# Altium PCB M9A_12_3190102060_A.PcbDoc
Units mil, origin at the board's own origin, x right, y up, seen from the top; angles counter-clockwise.
Board outline 4000 x 3760 mil, 2 copper layers (Top Layer, Bottom Layer); 14 components, 19 nets, 84 pads, 21 vias.
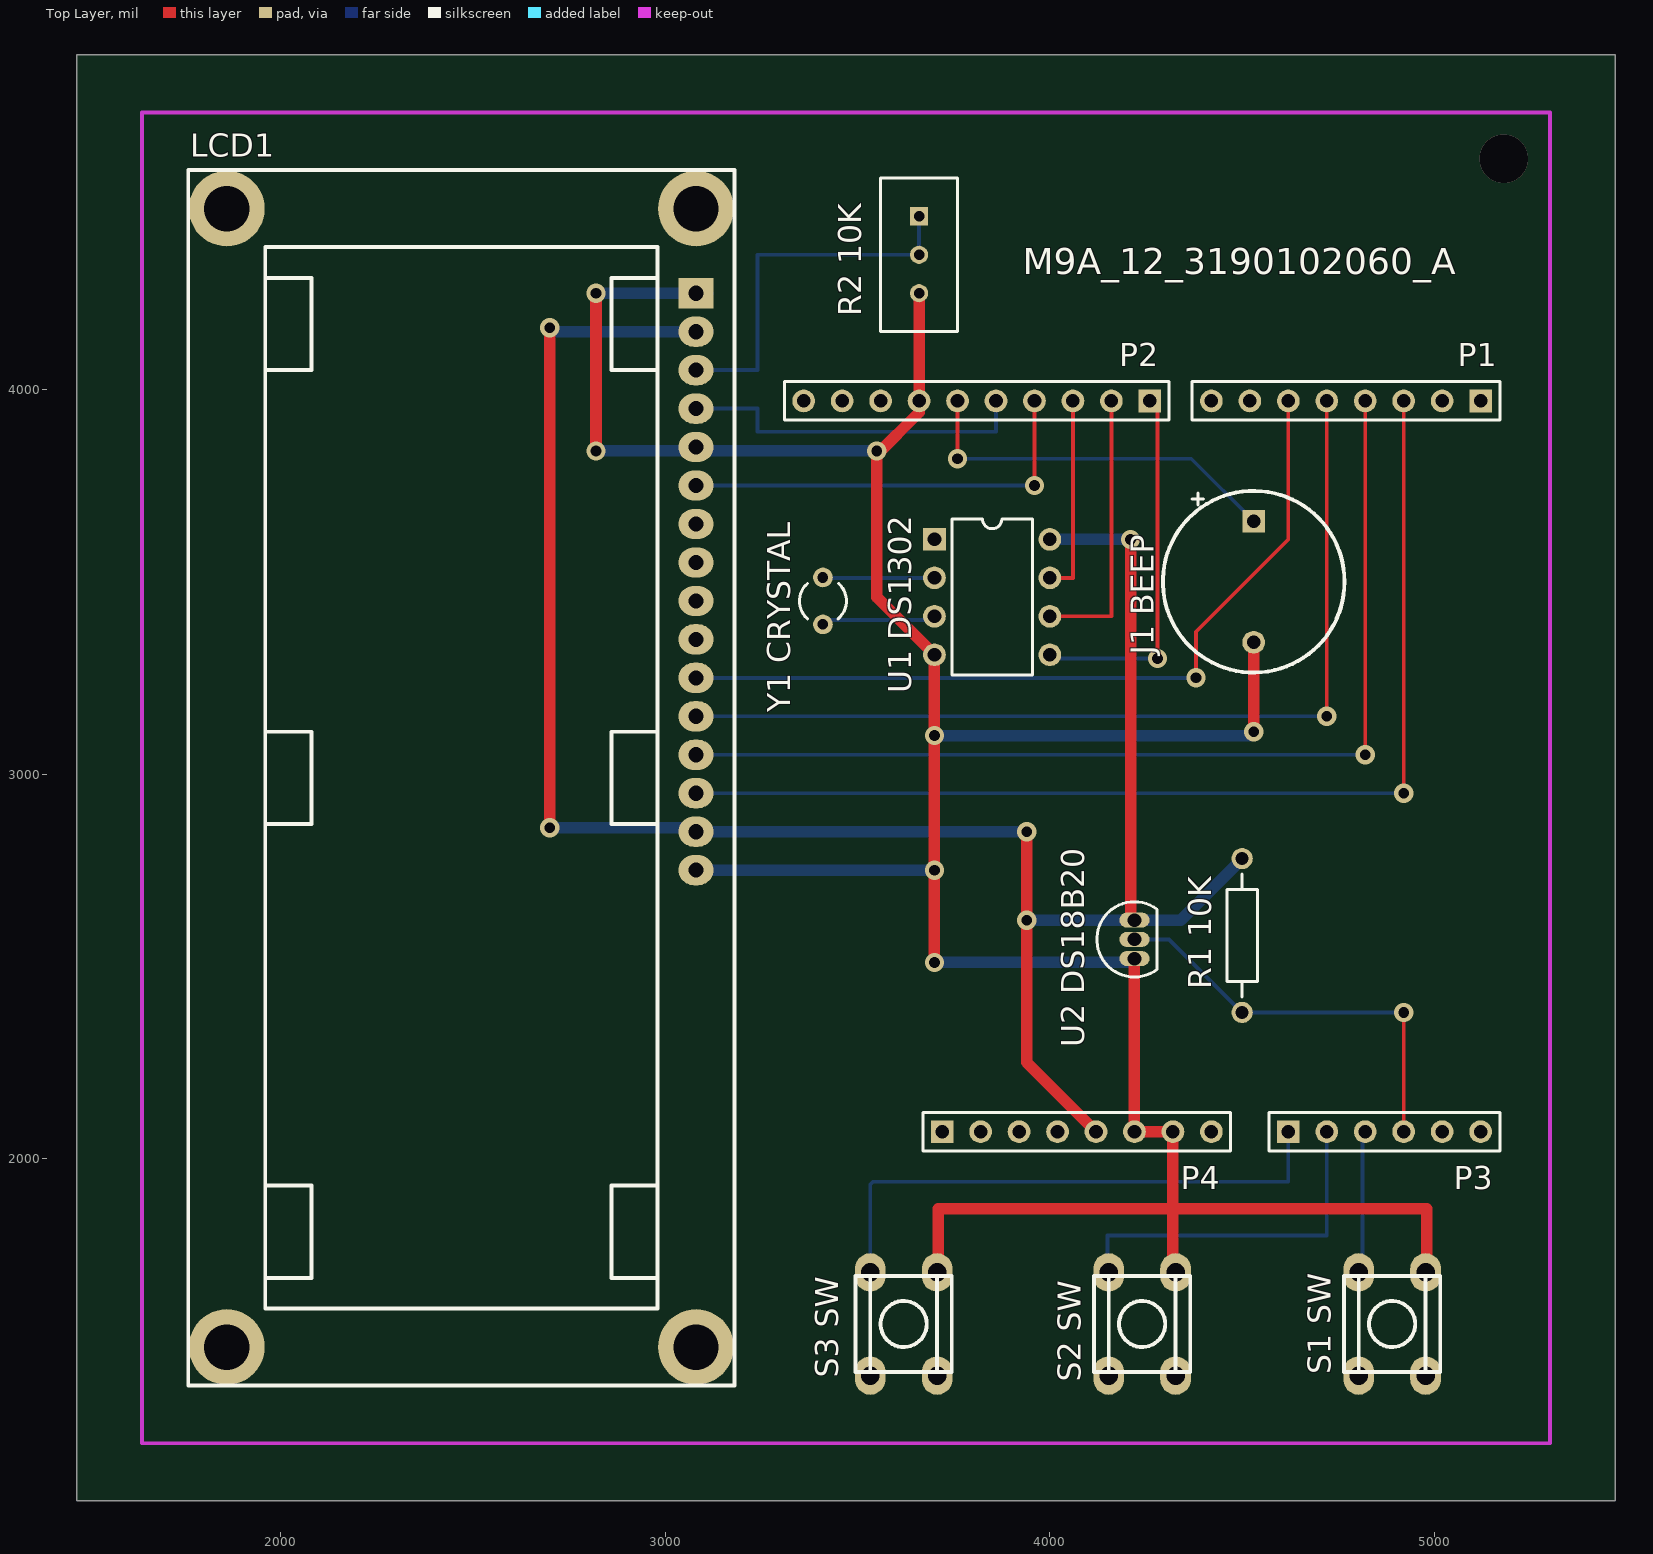
[diagram p0: Top Layer view]
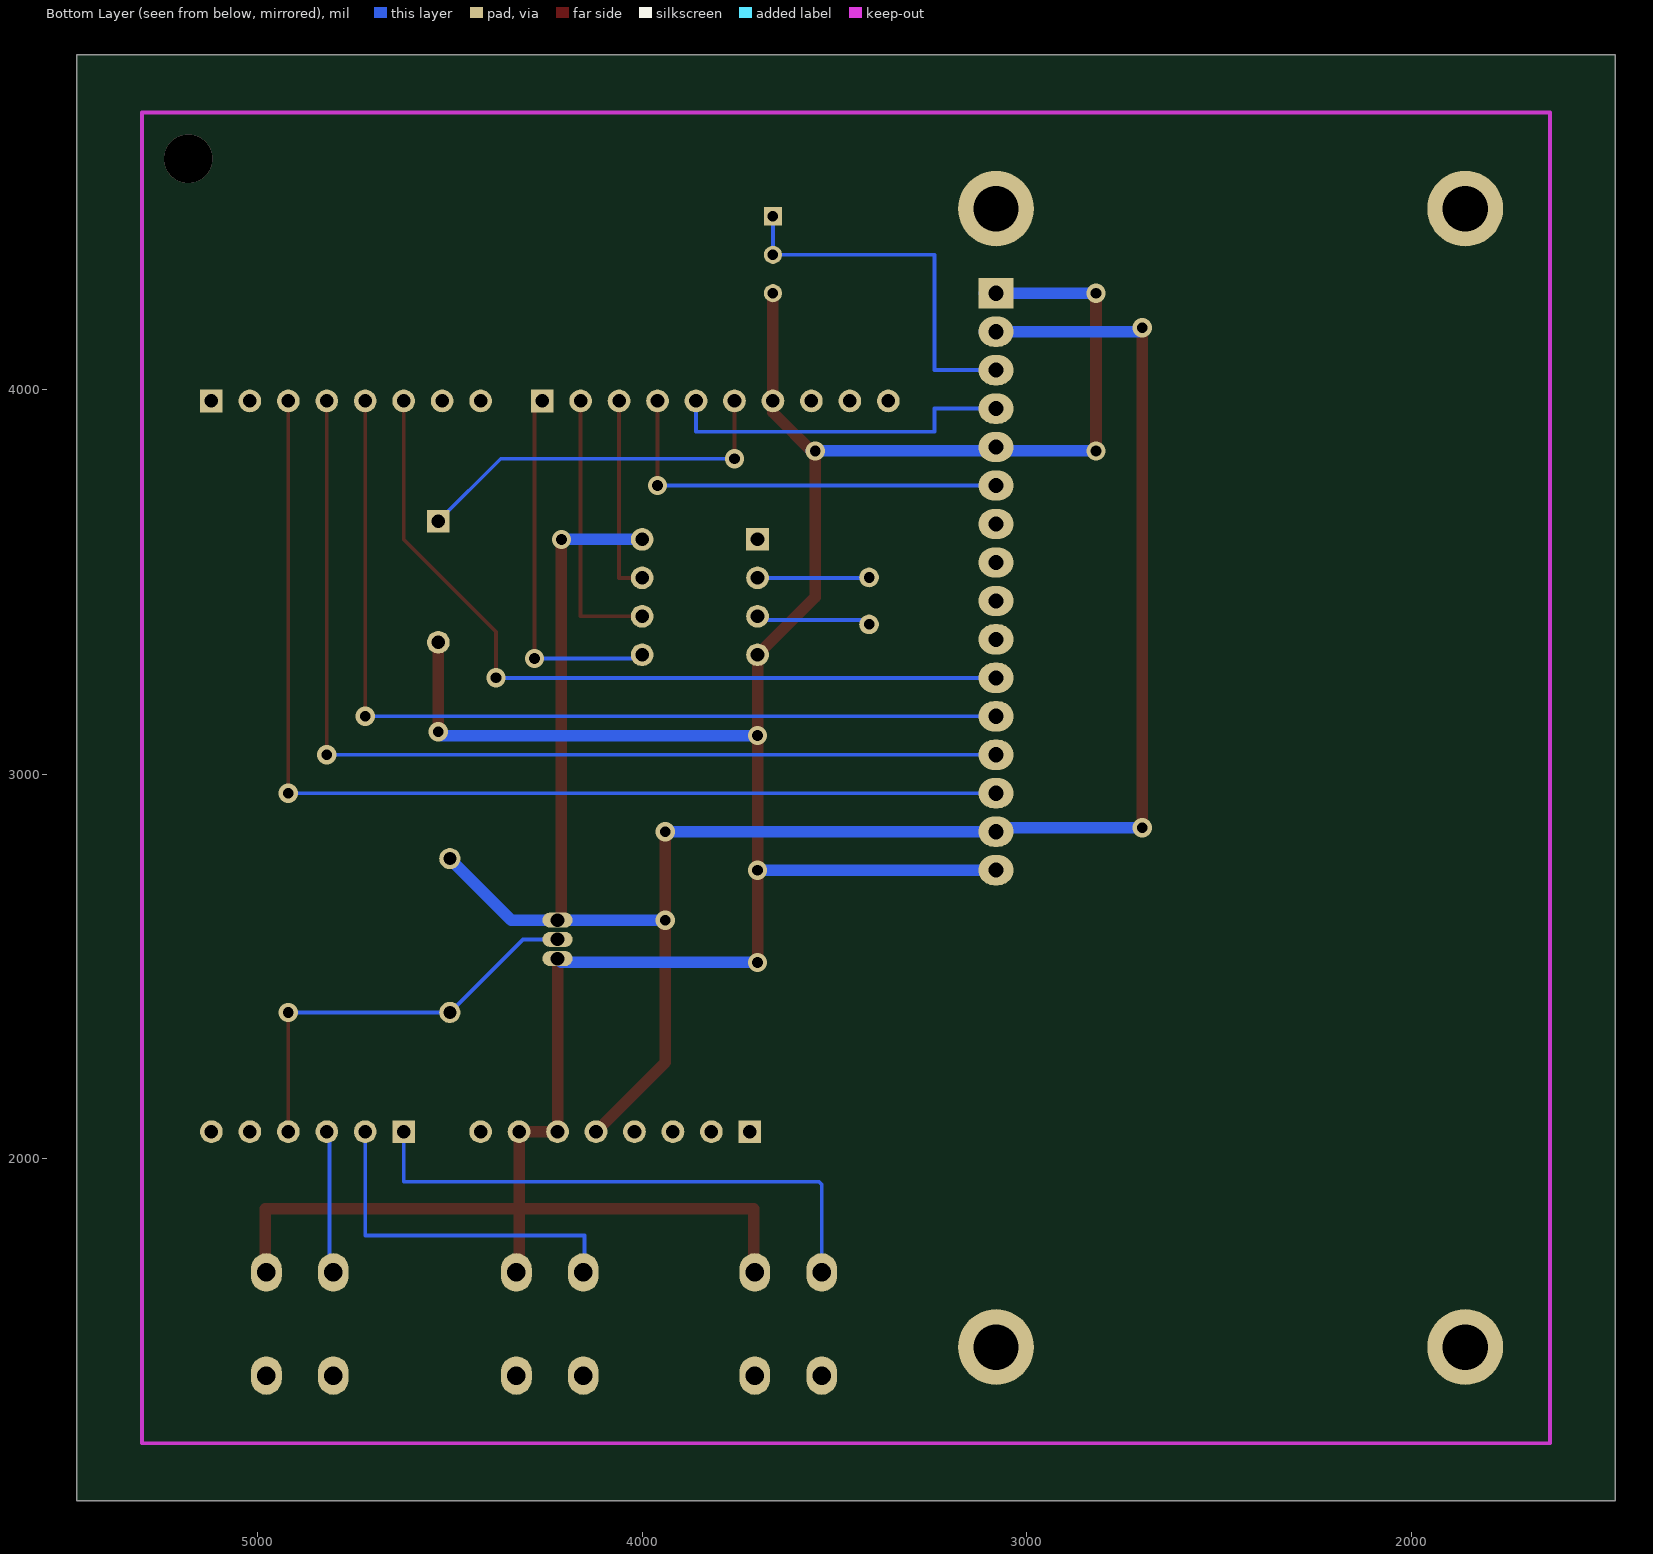
[diagram p1: Bottom Layer view, seen from below]

## Layer stack, top to bottom
Top Layer: signal copper 1.4
Dielectric: dielectric 12.6, FR-4, Dk 4.8
Bottom Layer: signal copper 1.4

## Board outline
1470,1110 1470,4870 5470,4870 5470,1110

## Design rules (kind name [scope] priority, off if disabled: settings)
Clearance [All] p1: gap=5
ComponentClearance [All] p1 off: gap=10 collisioncheckmode=3 verticalgap=10 showdistances=FALSE
Height [All] p1 off: minheight=0 maxheight=1000 prefheight=500
HoleSize [All] p1 off: absolutevalues=TRUE maxlimit=100 minlimit=1 maxpercent=80.000 minpercent=20.000
MinimumSolderMaskSliver [All] p1 off: minsoldermaskwidth=10
PolygonConnect [All] p1: connectstyle=Relief reliefconductorwidth=10 reliefentries=4 polygonreliefangle="90 Angle"
RoutingVias [All] p1: holewidth=28 width=50 viastyle="Through Hole" minholewidth=20 minwidth=10 maxholewidth=200 maxwidth=200
SilkscreenOverComponentPads [All] p1 off: minsilkscreentomaskgap=10
SolderMaskExpansion [All] p1: expansion=4
TestPointUsage [All] p1: valid=0 allowmultiple=FALSE
Testpoint [All] p1: side=15 testpointundercomponent=TRUE minsize=40 maxsize=100 preferedsize=60 minholesize=0 maxholesize=40 preferedholesize=32 testpointgrid=1 style=1023 order=0-112345678
Width [All] p1: maxlimit=30 minlimit=10 preferedwidth=10 minimp=50.000000 maximp=50.000000 favimp=50.000000
19 further rules are at their usual default settings.

## Components (designator, comment, footprint, x,y, rotation, side; value= is the part's Value field where it differs from the comment)
"J1 BEEP" "BEEP" Beep 4530,3500 r270 top (schematic designator J1)
LCD1 "LCD1602" 1602 3080,4250 r270 top
P1 "MHDR1X8" HDR1X8 5120,3970 r180 top
P2 "MHDR1X10" HDR1X10 4260,3970 r180 top
P3 "MHDR1X6" HDR1X6 4620,2070 r0 top
P4 "MHDR1X8" HDR1X8 3720,2070 r0 top
"R1 10K" "Res2" AXIAL-0.4 4500,2580 r270 top (schematic designator R1)
"R2 10K" "RPot" VR_A1 3660,4350 r270 top (schematic designator R2)
"S1 SW" "SW-PB4" AN-S 4890,1570 r90 top (schematic designator S1)
"S2 SW" "SW-PB4" AN-S 4240,1570 r90 top (schematic designator S2)
"S3 SW" "SW-PB4" AN-S 3620,1570 r90 top (schematic designator S3)
"U1 DS1302" "DS1302" DIP8 3850,3460 r270 top (schematic designator U1)
"U2 DS18B20" "DS18B20" TO-92A 4220,2570 r0 top (schematic designator U2)
"Y1 CRYSTAL" "XTAL" R38 3410,3450 r0 top (schematic designator Y1)

## Footprints (in the part's own frame and the unit in brackets; to place one, negate y for a bottom-side part, rotate by r counter-clockwise, add the part's x,y. Pads: shape width x height; smd on the part's side, far side on the other; paste and mask are expansions set on the pad)
1602 [mm]
  round 5 hole 3: 0(-5.588,0) 0(-5.588,-30.988) 0(69.596,-30.988) 0(69.596,0)
  rect 2x2.3 hole 1: 1(0,0)
  oval 2x2.3 hole 1: 2(2.54,0) 3(5.08,0) 4(7.62,0) 5(10.16,0) 6(12.7,0) 7(15.24,0) 8(17.78,0) 9(20.32,0) 10(22.86,0) 11(25.4,0) 12(27.94,0) 13(30.48,0) 14(33.02,0) 15(35.56,0) 16(38.1,0)
  silkscreen extent -8.13,-33.53 72.14,2.54
AN-S [mil]
  oval 100x80 hole 48: 1(-134,87) 1(134,87) 2(-134,-87) 2(134,-87)
  silkscreen extent -125,-125 125,125
AXIAL-0.4 [mm] "Resistor; 2 Leads"
  round 1.4 hole 0.85: 1(-5.08,0) 2(5.08,0)
  silkscreen extent -4.06,-1.02 4.06,1.02
Beep [mm] "蜂鸣器"
  rect 1.5x1.5 hole 0.9: 1(-4,0)
  round 1.5 hole 0.9: 2(4,0)
  silkscreen extent -6,-6 6,6
DIP8 [mm] "DIP; 8 Leads; Row Spacing 7.62 mm; Pitch 2.54 mm"
  rect 1.5x1.5 hole 0.9: 1(-3.81,-3.81)
  round 1.5 hole 0.9: 2(-1.27,-3.81) 3(1.27,-3.81) 4(3.81,-3.81) 5(3.81,3.81) 6(1.27,3.81) 7(-1.27,3.81) 8(-3.81,3.81)
  silkscreen extent -5.15,-2.65 5.15,2.65
HDR1X6 [mm] "Connector; Header; 6 Position"
  rect 1.5x1.5 hole 0.9: 1(0,0)
  round 1.5 hole 0.9: 2(2.54,0) 3(5.08,0) 4(7.62,0) 5(10.16,0) 6(12.7,0)
  silkscreen extent -1.27,-1.27 13.97,1.27
HDR1X8 [mm] "Connector; Header; 8 Position"
  rect 1.5x1.5 hole 0.9: 1(0,0)
  round 1.5 hole 0.9: 2(2.54,0) 3(5.08,0) 4(7.62,0) 5(10.16,0) 6(12.7,0) 7(15.24,0) 8(17.78,0)
  silkscreen extent -1.27,-1.27 19.05,1.27
HDR1X10 [mm] "Connector; Header; 10 Position"
  rect 1.5x1.5 hole 0.9: 1(0,0)
  round 1.5 hole 0.9: 2(2.54,0) 3(5.08,0) 4(7.62,0) 5(10.16,0) 6(12.7,0) 7(15.24,0) 8(17.78,0) 9(20.32,0) 10(22.86,0)
  silkscreen extent -1.27,-1.27 24.13,1.27
R38 [mm] "Crystal, Thru-Hole; 2 Leads; Body 3.1 x 8.2 mm (Dia.xH)"
  round 1.3 hole 0.7: 1(0,1.55) 2(0,-1.55)
  silkscreen extent -1.55,-1.19 1.55,1.17
TO-92A [mm]
  oval 2x1 hole 0.9: 1(0,-1.27) 2(0,0) 3(0,1.27)
  silkscreen extent -2.48,-2.48 1.5,2.48
VR_A1 [mm] "Potentiometer; 3 Leads"
  rect 1.2x1.2 hole 0.7: 1(-2.54,0)
  round 1.2 hole 0.7: 2(0,0) 3(2.54,0)
  silkscreen extent -5.08,-2.54 5.08,2.54, body extent -5.08,-2.54 5.08,2.54, height 10.5

## Part data
"J1 BEEP": "蜂鸣器"
P1 P4: "Header, 8-Pin"
P2: "Header, 10-Pin"
P3: "Header, 6-Pin"
"R1 10K": "Resistor"
"R2 10K": "精密可调电阻"
"S1 SW" "S2 SW" "S3 SW": "微动开关"
"U1 DS1302": "Trickle Charge Timekeeping Chip"
"U2 DS18B20": "温度传感器"
"Y1 CRYSTAL": "Crystal Oscillator"

## Via types
v1: diameter 50, hole 28, Top Layer to Bottom Layer, 20 vias
v2: diameter 125.98, hole 125.98, Top Layer to Bottom Layer, 1 vias

## Nets (pads, with @x,y where several pads share a name; then routed paths per layer and width w, separated by ;. In a path a pad name is that pad's centre, name@x,y a point inside that pad or via, vN(x,y) a via of type N, cw(c..) or ccw(c..) an arc to the next point about the centre after c; other vN are vias at no path point)
GND: "J1 BEEP.2" "R2 10K.3" "S1 SW.2"@4977,1704 "S2 SW.2"@4327,1704 "S3 SW.2"@3707,1704 "U1 DS1302.4" "U2 DS18B20.1" LCD1.1 LCD1.5 LCD1.16 P2.7 P4.6 P4.7 | length 8009.4
  Top Layer w30: v1(2820,3840) v1(2820,4250) ; v1(3550,3840) v1@3550,3830 ; 3660,4250 P2.7 3660,3940 v1@3550,3830 ; v1(3700,2510) v1(3700,2750) v1(3700,3100) 3700,3310 3550,3460 v1@3550,3830 ; 3710,1697 3710,1870 4320,1870 ; 4220,2520 P4.6 P4.7 4320,1870 ; 4320,1701 4320,1870 ; v1(4530,3110) 4530,3342.52 4530,3340 ; 5000,1697 4980,1717 4980,1870 4320,1870
  Bottom Layer w30: v1(2820,4250) LCD1.1 LCD1.1@3110,4250 ; v1@2820.8,3840 v1(3550,3840) v1@3560,3840 ; LCD1.16@3110,2750 v1(3700,2750) ; v1(3700,2510) 4210,2510 ; v1(3700,3100) 4520,3100 v1(4530,3110)
NetJ1_1: "J1 BEEP.1" P2.6 | length 987.5
  Top Layer w10: v1(3760,3819.69) P2.6
  Bottom Layer w10: v1(3760,3819.69) 4367.79,3819.69 4530,3657.48
NetLCD1_3: "R2 10K.1" "R2 10K.2" LCD1.3 | length 980
  Bottom Layer w10: LCD1.3 3240,4050 3240,4350 3660,4350 3660,4450
NetLCD1_4: LCD1.4 P2.5 | length 890
  Bottom Layer w10: LCD1.4@3110,3950 3240,3950 3240,3890 3860,3890 P2.5
NetLCD1_6: LCD1.6 P2.4 | length 1070
  Top Layer w10: v1(3960,3750) P2.4
  Bottom Layer w10: LCD1.6@3110,3750 v1(3960,3750)
NetLCD1_11: LCD1.11 P1.6 | length 2089.4
  Top Layer w10: v1(4380,3250) 4380,3370 4620,3610 P1.6
  Bottom Layer w10: LCD1.11@3110,3250 v1(4380,3250)
NetLCD1_12: LCD1.12 P1.5 | length 2430
  Top Layer w10: v1(4720,3150) 4720,3820 P1.5
  Bottom Layer w10: LCD1.12@3110,3150 v1(4720,3150)
NetLCD1_13: LCD1.13 P1.4 | length 2630
  Top Layer w10: v1(4820,3050) P1.4
  Bottom Layer w10: LCD1.13@3110,3050 v1(4820,3050)
NetLCD1_14: LCD1.14 P1.3 | length 2830
  Top Layer w10: v1(4920,2950) P1.3
  Bottom Layer w10: LCD1.14@3110,2950 v1(4920,2950)
NetP2_1: "U1 DS1302.5" P2.1 | length 958.3
  Top Layer w10: P2.1 4280,3950 v1@4280,3310
  Bottom Layer w10: 4000,3300 4070,3300 v1@4290,3300
  other v1: 4280,3300
NetP2_2: "U1 DS1302.6" P2.2 | length 720
  Top Layer w10: 4000,3410 4160,3410 P2.2
NetP2_3: "U1 DS1302.7" P2.3 | length 520
  Top Layer w10: 4000,3510 4060,3510 P2.3
NetP3_1: "S3 SW.1"@3533,1704 P3.1 | length 1458.9
  Bottom Layer w10: 3533,1694 3533,1933 3540,1940 4620,1940 P3.1
NetP3_2: "S2 SW.1"@4153,1704 P3.2 | length 951.4
  Bottom Layer w10: 4140,1717 4150,1707 ; 4153,1704 4150,1707 ; P3.2 4720,1800 4150,1800 4150,1707
NetP3_3: "S1 SW.1"@4803,1704 P3.3 | length 367
  Bottom Layer w10: 4813,1700 P3.3@4813,2067
NetP3_4: "R1 10K.2" "U2 DS18B20.2" P3.4 | length 1088.7
  Top Layer w10: P3.4 4920,2370 v1(4920,2380)
  Bottom Layer w10: 4220,2570 4310,2570 4500,2380 v1(4920,2380)
NetU1_2: "U1 DS1302.2" "Y1 CRYSTAL.1" | length 289
  Bottom Layer w10: 3410,3510 3698.98,3510
NetU1_3: "U1 DS1302.3" "Y1 CRYSTAL.2" | length 279
  Bottom Layer w10: 3410,3400 3688.98,3400
VCC: "R1 10K.1" "U1 DS1302.8" "U2 DS18B20.3" LCD1.2 LCD1.15 P4.5 | length 5615
  Top Layer w30: v1(2700,2860) v1(2700,4160) ; v1(3940,2850) 3940,2250 P4.5 ; 4210,2620 v1(4210,3610)
  Bottom Layer w10: v1(2700,4160) v1@2710,4150
  Bottom Layer w30: v1(2700,2860) LCD1.15@3100,2860 ; v1@2710,4150 LCD1.2@3110,4150 ; LCD1.15@3110,2850 v1(3940,2850) ; v1(3940,2620) 4210,2620 ; 4000,3610 v1(4210,3610) ; 4220,2620 4340,2620 4500,2780
pads on no net: "S1 SW.1"@4803,1436 "S1 SW.2"@4977,1436 "S2 SW.1"@4153,1436 "S2 SW.2"@4327,1436 "S3 SW.1"@3533,1436 "S3 SW.2"@3707,1436 "U1 DS1302.1" LCD1.0 LCD1.7 LCD1.8 LCD1.9 LCD1.10 P1.1 P1.2 P1.7 P1.8 P2.8 P2.9 P2.10 P3.5 P3.6 P4.1 P4.2 P4.3 P4.4 P4.8
copper on no net:
  other v2: 5180,4600

## Keep-outs
Keep-Out Layer:
  lines w10: 1640,1260 1640,4720 5300,4720 5300,1260 1640,1260

## Silkscreen, mask and mechanical layers (free items; w line width, h text height)
Top Overlay:
  text "M9A_12_3190102060_A" at 3930,4300 h68